# Altium PCB PCB.pcbdoc (part 2 of 2)
Units mil, origin at the board's own origin, x right, y up, seen from the top; angles counter-clockwise.
Board outline 3400 x 4946.88 mil, 4 copper layers (Top Layer, Inner1, Inner2, Bottom Layer); 148 components, 84 nets, 392 pads, 234 vias.
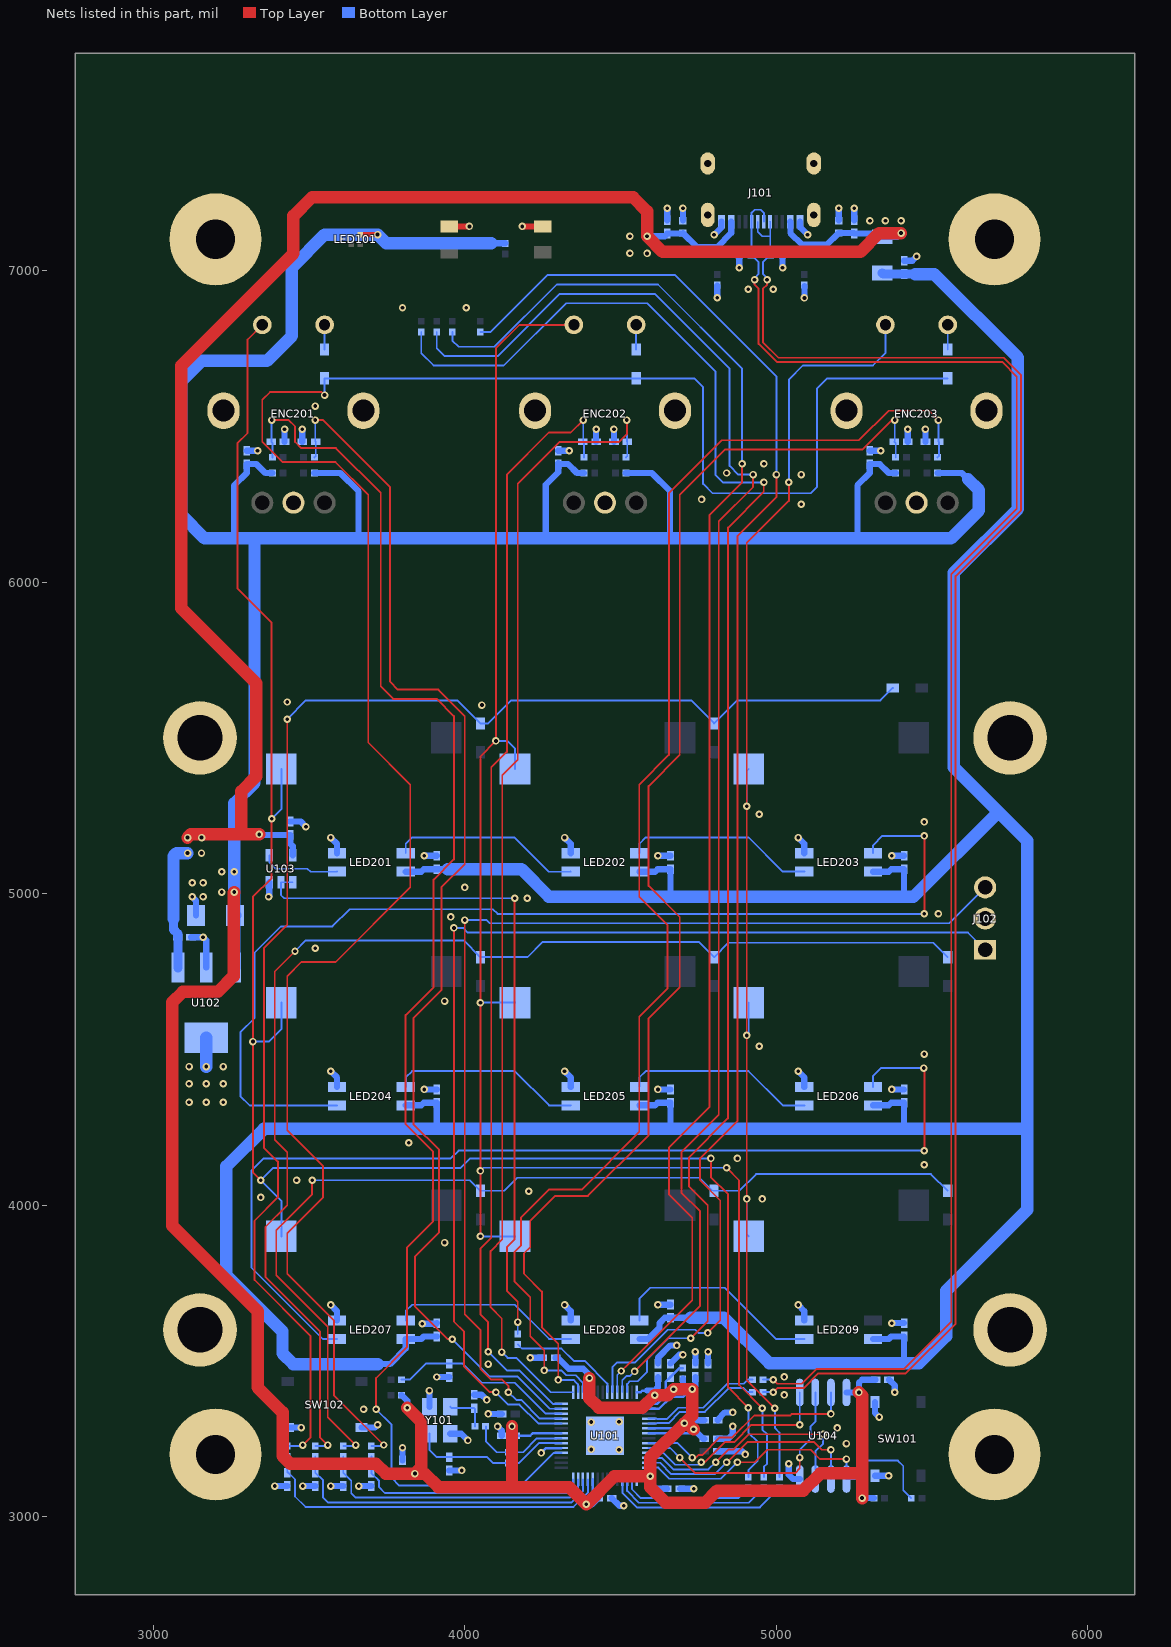
[diagram p4: the nets of this part, all layers, seen from the top]

## Via types
v1: diameter 24.02, hole 12.01, Top Layer to Bottom Layer, 234 vias

## Nets (pads, with @x,y where several pads share a name; then routed paths per layer and width w, separated by ;. In a path a pad name is that pad's centre, name@x,y a point inside that pad or via, vN(x,y) a via of type N, cw(c..) or ccw(c..) an arc to the next point about the centre after c; other vN are vias at no path point) (continued)
+3V3: C102.2 C103.2 C104.2 C105.2 C107.2 C112.2 C113.2 C114.2 C115.2 C116.2 C126.2 C201.2 C202.2 C207.2 LED101.1 R102.1 R103.2 R122.2 R123.2 R201.2 R202.2 R203.2 R204.2 R209.2 R210.2 U101.1 U101.10 U101.22 U101.33 U101.42 U101.44 U101.48 U101.49 U102.3 U104.8 | length 15192.3
  Top Layer w16: LED101.1@3665.16,7115.16 v1(3720,7115.16)
  Top Layer w40: v1(3260,5005) 3257.7,5002.7 3257.7,4735 3207.7,4685 3095,4685 3060.87,4650.87 3060.87,3934.13 3335,3660 3335,3415 3415,3335 3415,3195 3440,3170 3715,3170 3746.46,3138.54 v1(3840,3138.54) ; v1(3815,3350) 3860,3305 3860,3158.54 v1(3840,3138.54) ; v1(4151.46,3290) 4151.46,3107.24 4163.7,3095 ; v1(4400,3445) 4400,3380 4430,3350 4570,3350 v1(4610,3390) 4651.02,3390 v1(4670,3408.98) 4728.98,3408.98 v1(4730,3410) 4730,3325 v1(4705,3300) ; v1(4734.27,3280.73) 4715,3300 v1(4705,3300) ; v1(5265,3398.98) 5275,3388.98 5275,3138.92 ; v1(5275,3060) 5275,3138.92 ; v1(3840,3138.54) 3871.46,3138.54 3915,3095 4163.7,3095 ; 4163.7,3095 4335,3095 v1(4390,3040) 4480,3130 v1(4595,3130) ; v1(4595,3130) 4595,3190 v1(4705,3300) ; v1(4595,3130) 4595,3095 4645,3045 4771.19,3045 4809.86,3083.66 5085.91,3083.66 5141.17,3138.92 5275,3138.92
  Bottom Layer w8.1: C114.2@4161.46,3260 4210,3260 4217.87,3267.87 U101.22@4310.23,3267.87 ; v1(4400,3445) 4410.64,3434.36 U101.33@4410.64,3399.77 ; U101.10@4410.64,3120.23 4410.64,3077.91 C115.2@4428.54,3060 ; U101.1@4552.36,3120.23 4565.23,3120.23 4575,3130 v1(4595,3130) ; U101.42@4552.36,3399.77 4564.77,3399.77 4570,3405 4585,3405 ; U101.49@4589.77,3267.87 4721.41,3267.87 v1(4734.27,3280.73) ; U101.48@4589.77,3283.62 4688.62,3283.62 v1(4705,3300) ; U101.44@4589.77,3346.61 4622.96,3346.61 4661.35,3385 4700,3385 4725,3410 v1(4730,3410)
  Bottom Layer w20: 3260,6140.03 3260,6310 3300,6350 C201.2@3300,6378.54 3331.46,6378.54 3360,6350 R201.2@3382.96,6350 ; R202.2@3517.04,6350 3600,6350 3659,6291 3659,6140 ; R123.2@3797.04,3390 3815,3372.04 v1(3815,3350) ; C102.2@3800,3138.54 v1(3840,3138.54) ; 4085,7087.04 R103.2@4130,7087.04 ; v1(4151.46,3290) 4161.46,3280 C114.2@4161.46,3260 ; 4260,6142.59 4260,6312.56 4300,6352.56 C202.2@4300,6381.1 ; C113.2@4291.46,3510 4298.89,3510 4333.7,3475.19 4379.81,3475.19 4400,3455 v1(4400,3445) ; C202.2@4300,6378.54 4331.46,6378.54 4360,6350 R203.2@4382.96,6350 ; v1(4390,3040) 4408.54,3040 C115.2@4428.54,3060 ; R204.2@4516.74,6350 4599.7,6350 4658.71,6291 4658.71,6140 ; 4585,3405 4610,3405 ; v1(4595,3130) 4595,3110 4615,3090 C116.2@4648.54,3090 ; v1(4610,3390) 4610,3405 ; C105.2@4620,3448.54 4620,3415 4610,3405 ; v1(4670,3408.98) 4683.98,3408.98 4700,3425 R102.1@4700,3442.96 ; v1(4705,3300) 4715,3310 C103.2@4768.54,3310 ; v1(4730,3410) 4740,3420 C107.2@4740,3448.54 ; v1(4734.27,3280.73) 4765,3250 C104.2@4768.54,3250 ; U104.8@5225,3398.98 v1(5265,3398.98) 5265,3430 5275,3440 C126.2@5318.54,3440 ; 5260,6140.03 5260,6310 5300,6350 C207.2@5300,6378.54 5331.46,6378.54 5360,6350 R209.2@5382.96,6350 ; v1(5275,3060) R122.2@5312.96,3060 ; R210.2@5517.04,6350 5595,6350 5615,6330
  Bottom Layer w40: U102.3@3260.55,4762.5 C112.2@3260.55,4927.85 ; C112.2@3262.7,4930 3260,4932.7 v1(3260,5005) v1(3260,5070) 3260,5290 3325,5355 3325,6140 ; 4085,7087.04 3748.12,7087.04 v1(3720,7115.16) 3550.16,7115.16 3445,7010 3445,6790 3365,6710 3155,6710 3090,6645 3090,6215 3165,6140 3260,6140 3325,6140 ; 5615,6330 5650,6295 5650,6230 5560,6140 5259.97,6140 4658.71,6140 3659,6140 3325,6140
  other v1: 3220,5005 3220,5070
+3V3_A: C106.2 R102.2 U101.43 | length 183.2
  Bottom Layer w8.1: U101.43@4589.77,3362.36 4617.36,3362.36 4645,3390 4645,3433.54 C106.2@4660,3448.54 4688.5,3477.04 R102.2@4700,3477.04
+5V_LEDS: C101.2 C210.2 C211.2 C212.2 C213.2 C214.2 C215.2 C216.2 C217.2 C218.2 LED201.1 LED202.1 LED203.1 LED204.1 LED205.1 LED206.1 LED207.1 LED208.1 LED209.1 R101.2 | length 12142.2
  Bottom Layer w20: 3720,3490 3760,3490 3810.24,3540.24 LED207.1@3810.24,3570.47 3860.47,3570.47 3868.54,3578.54 C216.2@3910,3578.54 ; LED204.1@3810.24,4320.47 3860.47,4320.47 3868.54,4328.54 C213.2@3910,4328.54 3910,4247.17 ; LED201.1@3810.24,5070.47 3860.47,5070.47 3868.54,5078.54 C210.2@3910,5078.54 3945,5078.54 ; LED208.1@4560.24,3570.47 4588.53,3570.47 4624.91,3606.85 4624.91,3621.69 4641.76,3638.54 C217.2@4660,3638.54 4725,3638.54 ; LED205.1@4560.24,4320.47 4610.47,4320.47 4618.54,4328.54 C214.2@4660,4328.54 4660,4247.73 4657.27,4245 ; LED202.1@4560.24,5070.47 4610.47,5070.47 4618.54,5078.54 C211.2@4660,5078.54 4660,4991.89 4658.11,4990 ; LED209.1@5310.24,3570.47 5360.47,3570.47 5368.54,3578.54 C218.2@5410,3578.54 5410,3492.7 ; LED206.1@5310.24,4320.47 5360.47,4320.47 5368.54,4328.54 C215.2@5410,4328.54 5410,4247.02 5407.98,4245 ; LED203.1@5310.24,5070.47 5360.47,5070.47 5368.54,5078.54 C212.2@5410,5078.54 5410,4990.1 5410.1,4990
  Bottom Layer w30: R101.2@5340,6991.78 5343.24,6988.54 C101.2@5410,6988.54 5445,6988.54
  Bottom Layer w40: 3720,3490 3449.36,3490 3414.9,3524.47 3414.9,3595.1 3235,3775 3235,4125 3355,4245 4657.27,4245 5407.98,4245 5805,4245 ; 3945,5078.54 4181.46,5078.54 4270,4990 4658.11,4990 5410.1,4990 5440,4990 5712.5,5262.5 ; 4725,3638.54 4831.46,3638.54 4977.3,3492.7 5410,3492.7 5457.7,3492.7 5545,3580 5545,3725 5805,3985 5805,4245 ; 5445,6988.54 5506.46,6988.54 5775,6720 5775,6235 5570,6030 5570,5405 5712.5,5262.5 ; 5712.5,5262.5 5805,5170 5805,4245
+5V_USB: C111.2 C119.2 C120.2 C125.2 D101.2 D102.2 J101.2 J101.11 R101.1 U102.1 U103.5 | length 5969.1
  Top Layer w40: v1(3110,5180) 3120,5190 3282.46,5190 ; v1(3340,5190) 3282.46,5190 ; v1(5400,7120) 5330,7120 5270,7060 4635,7060 v1(4585,7110) 4585,7190 4540,7235 3510,7235 3450,7175 3450,7055 3090,6695 3090,5915.52 3330,5675.52 3330,5375.95 3282.46,5328.41 3282.46,5190
  Bottom Layer w20: v1(3340,5190) 3341.46,5188.54 C125.2@3440,5188.54 3440,5160 3447.41,5152.6 U103.5@3447.41,5123.31 ; v1(4585,7110) 4641.46,7110 C119.2@4650,7118.54 4698.23,7118.54 D101.2@4700,7120.31 4745.31,7075 4810,7075 4855.52,7120.52 J101.2@4855.52,7156.49 ; J101.11@5044.49,7156.49 5045,7155.99 5045,7120 5082.5,7082.5 5162.19,7082.5 D102.2@5200,7120.31 5248.23,7120.31 C120.2@5250,7118.54 5329.68,7118.54 R101.1@5340,7108.22 5388.22,7108.22 v1(5400,7120)
  Bottom Layer w30: 3065,4920 3065,4885 3078.54,4871.46 C111.2@3078.54,4860 3079.45,4859.09 U102.1@3079.45,4762.5
  Bottom Layer w40: 3065,4920 3065,5120 3075,5130 v1(3110,5130)
  other v1: 3154.87,5130 3155,5180 4530,7055 4585,7054.81 4530,7110 5300.09,7160 5350,7160 5400,7160
COL0: ENC201.1 J201.1 J204.1 J207.1 R108.2 | length 6004.2
  Top Layer w6: v1(3345,4080) 3320,4105 v1(3320,4525) 3320,4990 3380,5050 v1(3380,5240) 3380,5870 3270,5980 3270,6445 3302.5,6477.5 3302.5,6778.14 ENC201.1@3350,6825.64 ; v1(4790,4150) 4790,4090 4845,4035 4845,3415 v1(4910,3350)
  Bottom Layer w6: v1(3320,4525) 3371.24,4525 3411.24,4565 J204.1@3411.24,4650 ; v1(3380,5240) 3411.24,5271.24 J201.1@3411.24,5400 ; J207.1@3411.24,3900 3411.24,4013.76 v1(3345,4080) 3384.44,4119.44 3986.84,4119.44 4017.41,4150 v1(4790,4150) ; R108.2@4910,3127.04 4910,3150 4940,3180 4940,3240 4910,3270 v1(4910,3350)
COL0_R: R108.1 U101.2 | length 430.6
  Bottom Layer w6: U101.2@4536.61,3120.23 4536.61,3088.39 4565,3060 4877.04,3060 R108.1@4910,3092.96
COL1: ENC202.1 J202.1 J205.1 J208.1 R110.2 | length 5356.2
  Top Layer w6: v1(4050,3900) v1(4050,4110) v1(4050,4650) 4050,5440 v1(4100,5490) 4100,6750 4175,6825 4349.36,6825 ENC202.1@4350,6825.64 ; v1(4840,4120) 4880,4080 4880,3423.01 v1(4955,3348.01)
  Bottom Layer w6: v1(4050,3900) J208.1@4161.24,3900 ; v1(4050,4110) 4060,4120 v1(4840,4120) ; v1(4050,4650) J205.1@4161.24,4650 ; v1(4100,5490) 4136.24,5490 4161.24,5465 J202.1@4161.24,5400 ; v1(4955,3348.01) 4955,3280 4970,3265 4970,3170 4960,3160 R110.2@4960,3127.04
COL1_R: R110.1 U101.3 | length 512
  Bottom Layer w6: U101.3@4520.86,3120.23 4520.86,3082.92 4558.79,3045 4912.04,3045 R110.1@4960,3092.96
COL2: ENC203.1 J203.1 J206.1 J209.1 R112.2 | length 4411
  Top Layer w6: v1(4995,3348.01) 4905,3438.01 v1(4905,4020) v1(4905,4545) v1(4905,5280) 4905,6125.4 5040,6260.4 v1(5040,6320)
  Bottom Layer w6: v1(4905,4020) 4905,3906.24 J209.1@4911.24,3900 ; v1(4905,4545) 4911.24,4551.24 J206.1@4911.24,4650 ; v1(4905,5280) 4905,5393.76 J203.1@4911.24,5400 ; v1(4995,3348.01) 4995,3285 5010,3270 R112.2@5010,3127.04 ; v1(5040,6320) 5040,6650 5085,6695 5310,6695 5350,6735 ENC203.1@5350,6825.64
COL2_R: R112.1 U101.4 | length 593.4
  Bottom Layer w6: U101.4@4505.11,3120.23 4505.86,3119.48 4505.86,3076.71 4552.57,3030 4947.04,3030 R112.1@5010,3092.96
CON_USB_N: D103.2 J101.5 J101.7 R109.1 | length 5202.8
  Top Layer w6.1: v1(4930,6970) 4930,6954.27 4943.2,6941.07 4943.2,6764.37 5001.17,6706.4 5724.37,6706.4 5771.4,6659.37 5771.4,6235 5561.4,6025 5561.4,3625.63 5409.37,3473.6 5128.6,3473.6 5081.8,3426.8 5003.2,3426.8 v1(4990,3440)
  Bottom Layer w6.1: v1(4930,6970) 4930,6975.63 4943.2,6988.83 4943.2,7026.48 D103.2@4919.69,7050 4920.48,7050.79 J101.5@4920.48,7156.49 4920.48,7185.48 4930,7195 4950,7195 4959.85,7185.15 J101.7@4959.85,7156.49 ; R109.1@4957.04,3440 v1(4990,3440)
CON_USB_P: D104.2 J101.6 J101.8 R111.1 | length 5198.6
  Top Layer w6.1: v1(4970,6970) 4970,6954.27 4956.8,6941.07 4956.8,6770 5006.8,6720 5730,6720 5785,6665 5785,6229.37 5575,6019.37 5575,3620 5415,3460 5134.23,3460 5087.43,3413.2 5002.9,3413.2 v1(4989.7,3400)
  Bottom Layer w6.1: J101.6@4940.15,7156.49 4940.15,7124.85 4955.09,7109.91 4980.31,7109.91 ; R111.1@4956.74,3400 v1(4989.7,3400) ; v1(4970,6970) 4970,6975.63 4956.8,6988.83 4956.8,7026.48 D104.2@4980.31,7050 4980.31,7109.91 ; J101.8@4979.52,7156.49 4980.31,7155.7 4980.31,7109.91
ENC1_A: C203.2 R205.1 U101.18 | length 4734.8
  Top Layer w6: v1(3380,6520) 3435,6520 3455,6500 3455,6450 3475,6430 3586.03,6430 3730,6286.03 3730,5665 3770,5625 3910,5625 3965,5570 3965,5110 3900,5045 3900,4700 3810,4610 3810,4260 3897.5,4172.5 3897.5,3947.5 3815,3865 3815,3545 3715,3445 v1(3715,3345)
  Bottom Layer w6: v1(3380,6520) 3380,6451.46 C203.2@3378.54,6450 3382.96,6445.58 R205.1@3382.96,6400 ; v1(3715,3345) 3765,3295 3765,3125 3790,3100 4180,3100 4284.07,3204.07 4309.42,3204.07 U101.18@4310.23,3204.88
ENC1_B: C204.2 R207.1 U101.27 | length 3997.9
  Top Layer w6: v1(3520,6520) 3545,6520 3760,6305 3760,5680 3785,5655 3915,5655 4000,5570 4000,5095 3925,5020 3925,4690 3835,4600 3835,4260 3917.5,4177.5 3917.5,3912.5 3840,3835 3840,3675 3945,3570 v1(3960,3570)
  Bottom Layer w6: R207.1@3517.04,6400 3521.46,6404.42 C204.2@3521.46,6450 3520,6451.46 v1(3520,6520) ; v1(3960,3570) 4080,3450 4169.66,3450 4273.05,3346.61 U101.27@4310.23,3346.61
ENC1_SW: D210.2 ENC201.2 | length 79.5
  Bottom Layer w6: D210.2@3550,6746.16 ENC201.2@3550,6825.64
ENC2_A: C205.2 R206.1 U101.28 | length 3605.2
  Top Layer w6: v1(4075,3530) 4075,3625 4050,3650 4050,3860 4085,3895 4085,5405 4135,5455 4135,6345 4270,6480 4340,6480 v1(4380,6520)
  Bottom Layer w6: v1(4075,3530) 4135,3470 4175,3470 4282.64,3362.36 U101.28@4310.23,3362.36 ; v1(4380,6520) 4380,6451.46 C205.2@4378.54,6450 4382.96,6445.58 R206.1@4382.96,6400
ENC2_B: C206.2 R208.1 U101.29 | length 3703.6
  Top Layer w6: v1(4118.69,3528.69) 4118.69,3636.31 4082.5,3672.5 4082.5,3852.5 4120,3890 4120,5380 4170,5430 4170,6315 4305,6450 4495,6450 4520,6475 v1(4520,6520)
  Bottom Layer w6: v1(4118.69,3528.69) 4137.39,3510 4165,3510 4275.23,3399.77 U101.29@4347.64,3399.77 ; R208.1@4517.04,6400 4521.46,6404.42 C206.2@4521.46,6450 4520,6451.46 v1(4520,6520)
ENC2_SW: D211.2 ENC202.2 | length 79.5
  Bottom Layer w6: D211.2@4550,6746.16 ENC202.2@4550,6825.64
ENC3_A: C208.2 R211.1 U101.30 | length 4244.3
  Top Layer w6: v1(4300,3439.19) 4300,3555 4247.5,3607.5 4247.5,3722.5 4190,3780 4190,3845 4210,3865 4210,3950 4290,4030 4395,4030 4590,4225 4590,4600 4690,4700 4690,4925 4590,5025 4590,5345 4690,5445 4690,6280 4835,6425 5275,6425 5370,6520 v1(5380,6520)
  Bottom Layer w6: v1(4300,3439.19) 4349.19,3439.19 4355.96,3432.42 4356.13,3432.42 4362.57,3425.98 4362.57,3425.81 4363.39,3425 U101.30@4363.39,3399.77 ; v1(5380,6520) 5380,6451.46 C208.2@5378.54,6450 5382.96,6445.58 R211.1@5382.96,6400
ENC3_B: C209.2 R212.1 U101.31 | length 4476.6
  Top Layer w6: v1(4255,3469.6) 4255,3535 4210,3580 4210,3705 4160,3755 4160,3850 4180,3870 4180,3960 4270,4050 4375,4050 4560,4235 4560,4605 4650,4695 4650,4900 4560,4990 4560,5350 4655,5445 4655,6285 4825,6455 5265,6455 5360,6550 5490,6550 v1(5520,6520)
  Bottom Layer w6: v1(4255,3469.6) 4309.6,3469.6 4325,3454.19 4355.57,3454.19 4379.14,3430.63 U101.31@4379.14,3399.77 ; R212.1@5517.04,6400 5521.46,6404.42 C209.2@5521.46,6450 5520,6451.46 v1(5520,6520)
ENC3_SW: D212.2 ENC203.2 | length 79.5
  Bottom Layer w6: D212.2@5550,6746.16 ENC203.2@5550,6825.64
GND: C101.1 C102.1 C103.1 C104.1 C105.1 C106.1 C107.1 C108.1 C109.1 C110.1 C111.1 C112.1 C113.1 C114.1 C115.1 C116.1 C117.1 C118.1 C119.1 C120.1 C121.1 C122.1 C123.2 C124.2 C125.1 C126.1 C127.1 C201.1 C202.1 C203.1 C204.1 C205.1 C206.1 C207.1 C208.1 C209.1 C210.1 C211.1 C212.1 C213.1 C214.1 C215.1 C216.1 C217.1 C218.1 D101.1 D102.1 D103.1 D104.1 ENC201.3 ENC201.4 ENC201.C ENC202.3 ENC202.4 ENC202.C ENC203.3 ENC203.4 ENC203.C J101.1 J101.12 J101.13 J101.14 J102.2 LED102.2 LED103.2 LED201.3 LED202.3 LED203.3 LED204.3 LED205.3 LED206.3 LED207.3 LED208.3 LED209.3 MH201.1 MH202.1 MH203.1 MH204.1 MH205.1 MH206.1 MH207.1 MH208.1 R118.1 R119.1 SW101.1 SW101.2 SW102.1 SW102.2 U101.19 U101.57 U102.2 U102.4 U103.3 U104.4 Y101.2 Y101.4 | length 3731.7
  Top Layer w20: LED103.2@3950,7141.35 v1(4015,7141.35) ; v1(4184.45,7141.35) LED102.2@4249.45,7141.35
  Bottom Layer w8.1: v1(4245,3205) 4260.63,3220.63 U101.19@4310.23,3220.63
  Bottom Layer w20: C111.1@3121.46,4860 v1(3160,4860) 3170,4850 U102.2@3170,4762.5 ; v1(3125,4990) 3137.3,4977.7 C112.1@3137.3,4930 ; C201.1@3300,6421.46 v1(3335,6421.46) ; v1(3370,4990) 3372.61,4992.6 U103.3@3372.61,5036.69 ; v1(3390,3098.54) C117.1@3430,3098.54 ; C203.1@3421.46,6450 v1(3421.46,6490) ; SW102.1@3431.89,3286.18 v1(3475,3286.18) ; C125.1@3440,5231.46 3473.54,5231.46 v1(3490,5215) ; C204.1@3478.54,6450 v1(3478.54,6490) ; v1(3480,3098.54) C118.1@3520,3098.54 ; v1(3570,3098.54) C121.1@3610,3098.54 ; v1(3570,3680) 3589.76,3660.24 LED207.3@3589.76,3629.53 ; v1(3570,4430) 3589.76,4410.24 LED204.3@3589.76,4379.53 ; v1(3570,5180) 3589.76,5160.24 LED201.3@3589.76,5129.53 ; v1(3660,3098.54) C122.1@3700,3098.54 ; SW102.2@3668.11,3286.18 3711.18,3286.18 v1(3720,3295) ; C102.1@3800,3181.46 v1(3800,3221.46) ; v1(3863,3619.46) 3908,3619.46 C216.1@3910,3621.46 ; v1(3870,4371.46) C213.1@3910,4371.46 ; v1(3870,5121.46) C210.1@3910,5121.46 ; Y101.2@3886.53,3353.31 v1(3886.53,3405) ; v1(3910,3448.54) C127.1@3950,3448.54 ; C123.2@3950,3148.54 v1(3990,3148.54) ; Y101.4@3953.47,3266.69 3988.31,3266.69 v1(4010,3245) ; C124.2@4030,3391.46 4053.54,3391.46 v1(4070,3375) ; v1(4075,3330) C110.1@4118.54,3330 ; v1(4105,3290) 4118.54,3276.46 C114.1@4118.54,3260 ; v1(4210,3510) C113.1@4248.54,3510 ; C202.1@4300,6421.46 v1(4335,6421.46) ; v1(4320,3680) 4339.76,3660.24 LED208.3@4339.76,3629.53 ; v1(4320,4430) 4339.76,4410.24 LED205.3@4339.76,4379.53 ; v1(4320,5180) 4339.76,5160.24 LED202.3@4339.76,5129.53 ; C205.1@4421.46,6450 v1(4421.46,6490) ; C115.1@4471.46,3060 4496.46,3035 v1(4510,3035) ; C206.1@4478.54,6450 v1(4478.54,6490) ; C105.1@4620,3491.46 4620,3510 4660,3550 v1(4680,3550) ; v1(4620,3680.67) C217.1@4660,3680.67 ; v1(4620,4371.46) C214.1@4660,4371.46 ; v1(4620,5121.46) C211.1@4660,5121.46 ; C119.1@4650,7161.46 v1(4650,7200) ; C106.1@4660,3491.46 4688.54,3520 v1(4700,3520) ; C116.1@4691.46,3090 v1(4735,3090) ; D101.1@4700.01,7161.46 v1(4700.01,7200) ; C107.1@4740,3491.46 v1(4740,3530) ; C108.1@4780.61,3491.46 v1(4780.61,3530) ; v1(4800,7115) 4824.02,7139.02 J101.1@4824.02,7156.49 ; v1(4810,6912.15) R119.1@4810,6950.69 ; C109.1@4811.46,3210 4890,3210 v1(4900,3200) ; C104.1@4811.46,3250 4845,3250 4860,3265 v1(4860,3290) ; C103.1@4811.46,3310 4811.46,3311.46 4835,3335 v1(4860,3335) ; v1(4881.1,7008.91) D103.1@4881.1,7047.45 ; v1(5019.68,7008.9) D104.1@5019.68,7047.44 ; v1(5040,3170) 5040,3135 5053.98,3121.02 U104.4@5075,3121.02 ; v1(5070,3680) 5089.76,3660.24 LED209.3@5089.76,3629.53 ; v1(5070,4430) 5089.76,4410.24 LED206.3@5089.76,4379.53 ; v1(5070,5180) 5089.76,5160.24 LED203.3@5089.76,5129.53 ; J101.12@5075.98,7156.49 5075.98,7139.02 v1(5100,7115) ; v1(5090,6911.86) R118.1@5090,6950.4 ; D102.1@5200.01,7161.46 v1(5200.01,7200) ; C120.1@5250,7161.46 v1(5250,7200) ; C207.1@5300,6421.46 v1(5335,6421.46) ; SW101.2@5316.18,3131.89 v1(5360,3131.89) ; SW101.1@5316.18,3368.11 5316.18,3333.82 v1(5330,3320) ; C126.1@5361.46,3440 5380,3421.46 v1(5380,3400) ; v1(5370,3621.46) C218.1@5410,3621.46 ; v1(5370,4371.46) C215.1@5410,4371.46 ; v1(5370,5121.46) C212.1@5410,5121.46 ; C101.1@5410,7031.46 5436.46,7031.46 v1(5450,7045) ; C208.1@5421.46,6450 v1(5421.46,6490) ; C209.1@5478.54,6450 v1(5478.54,6490)
  Bottom Layer w40: v1(3170,4445) U102.4@3170,4537.5
  other v1: 4495,3215 4406.18,3216.18 5225,3235 5195,3285 4406.18,3303.82 4495,3305 3675,3345 5025,3391.14 5025,3448.86 4075,3490 3935,3880 4955,4020 3345,4025 4205,4045 3460,4080 5475,4130 4875,4150 3820,4200 3115,4330 3170,4330 3225,4330 3115,4390 3170,4390 3225,4390 3115,4445 3225,4445 5475,4485 4945,4510 3935,4655 3520,4825 3955,4925 5520,4935 4200,4985 3160,4990 4000,5020 3125,5035 3160,5035 5475,5230 4945,5255 4055,5605 3430,5615 5080,6250 4760,6265 5080,6345 4840,6350 4960,6380 3520,6565 3800,6880 4005,6880 4910,6940 4990,6940
LED0_BUF: R117.2 U103.1 U103.2 | length 2256
  Top Layer w6: v1(4160,4985) 4160,3890 4135,3865 4135,3725 4170,3690 v1(4170,3625)
  Bottom Layer w6: U103.1@3447.39,5036.69 U103.2@3410.01,5036.69 3410,4995 3420,4985 v1(4160,4985) ; R117.2@4170,3587.04 v1(4170,3625)
LED0_DIN: LED201.4 U103.4 | length 253.1
  Bottom Layer w6: U103.4@3372.59,5123.31 3372.59,5100 3392.59,5080 3495,5080 3505,5070 3589.29,5070 LED201.4@3589.76,5070.47
LED0_RES: R117.1 U101.36 | length 367.4
  Bottom Layer w6: R117.1@4170,3552.96 4182.96,3540 4310,3540 4350,3500 4385,3500 4457.88,3427.12 U101.36@4457.88,3399.77
LED1_DIN: LED201.2 LED202.4 | length 614
  Bottom Layer w6: LED201.2@3810.24,5129.53 3810.24,5160 3830.24,5180 4160,5180 4270,5070 4339.29,5070 LED202.4@4339.76,5070.47
LED2_DIN: LED202.2 LED203.4 | length 614
  Bottom Layer w6: LED202.2@4560.71,5130 4560.71,5160.47 4580.71,5180.47 4910.47,5180.47 5020.47,5070.47 LED203.4@5089.76,5070.47 LED203.4@5090.23,5070.94
LED3_DIN: LED203.2 LED204.4 | length 3467.9
  Top Layer w6: v1(5475,4935) v1(5475,5185)
  Bottom Layer w6: LED204.4@3589.76,4320.47 3589.29,4320 3310,4320 3280,4350 3280,4555 3325,4600 3325,4810 3410,4895 3575,4895 3630,4950 4090,4950 4105,4935 v1(5475,4935) ; LED203.2@5310.24,5129.53 5310.24,5155 5340.24,5185 v1(5475,5185)
LED4_DIN: LED204.2 LED205.4 | length 614
  Bottom Layer w6: LED204.2@3810.71,4380 3810.71,4410.47 3830.71,4430.47 4160.47,4430.47 4270.47,4320.47 LED205.4@4339.76,4320.47 LED205.4@4340.23,4320.94
LED5_DIN: LED205.2 LED206.4 | length 614
  Bottom Layer w6: LED205.2@4560.71,4380 4560.71,4410.47 4580.71,4430.47 4910.47,4430.47 5020.47,4320.47 LED206.4@5089.76,4320.47 LED206.4@5090.23,4320.94
LED6_DIN: LED206.2 LED207.4 | length 3341.4
  Top Layer w6: v1(5473.15,4440) 5475,4438.15 v1(5475,4175)
  Bottom Layer w6: LED207.4@3589.76,3570.47 3544.53,3570.47 3315,3800 3315,4110 3355,4150 3955,4150 3980,4175 v1(5475,4175) ; LED206.2@5310.24,4379.53 5310.24,4415.24 5335,4440 v1(5473.15,4440)
LED7_DIN: LED207.2 LED208.4 | length 614
  Bottom Layer w6: LED207.2@3810.71,3630 3810.71,3660.47 3830.71,3680.47 4160.47,3680.47 4270.47,3570.47 LED208.4@4339.76,3570.47 LED208.4@4340.23,3570.94
LED8_DIN: LED208.2 LED209.4 | length 683
  Bottom Layer w6: LED208.2@4560.24,3629.53 4560.24,3700 4595.24,3735 4835,3735 5000,3570 5089.29,3570 LED209.4@5089.76,3570.47
QSPI_SCLK: U101.52 U104.6 | length 789.5
  Top Layer w6: v1(4690,3190) 4740,3140 5060,3140 5075,3155 v1(5075,3190)
  Bottom Layer w6: U101.52@4589.77,3220.63 4659.37,3220.63 v1(4690,3190) ; v1(5075,3190) 5075,3215 5110,3250 5110,3290 5125,3305 U104.6@5125,3398.98
QSPI_SD0: U101.53 U104.5 | length 657.9
  Top Layer w6: v1(4758.8,3175) 4770.21,3175 4835,3239.79 4864.83,3239.79 4920.04,3295 v1(5075,3295)
  Bottom Layer w6: U101.53@4589.77,3204.88 4590.52,3204.13 4638.33,3204.13 4675.47,3166.99 4750.8,3166.99 v1(4758.8,3175) ; v1(5075,3295) U104.5@5075,3398.98
QSPI_SD1: U101.55 U104.2 | length 747.3
  Top Layer w6: v1(4840,3175) 4842.46,3175 4907.46,3240 5120,3240 5145,3215 v1(5175,3215)
  Bottom Layer w6: U101.55@4589.77,3173.38 4626.66,3173.38 4663.04,3136.99 4801.99,3136.99 v1(4840,3175) ; U104.2@5175,3121.02 v1(5175,3215)
QSPI_SD2: U101.54 U104.3 | length 776.8
  Top Layer w6: v1(4805,3175) 4845.31,3215.31 4861.56,3215.31 4911.25,3265 v1(5150,3265)
  Bottom Layer w6: U101.54@4589.77,3189.13 4632.12,3189.13 4669.26,3151.99 4781.99,3151.99 v1(4805,3175) ; U104.3@5125,3121.02 5125,3210 5150,3235 v1(5150,3265)
QSPI_SD3: U101.51 U104.7 | length 731.4
  Top Layer w6: v1(4730,3190) 4741.26,3190 4749.27,3198.01 4761.85,3198.01 4818.63,3254.79 4858.61,3254.79 4928.82,3325 5045,3325 5050,3330 v1(5175,3330)
  Bottom Layer w6: U101.51@4589.77,3236.38 4683.62,3236.38 v1(4730,3190) ; v1(5175,3330) U104.7@5175,3398.98
QSPI_SS: R124.2 U101.56 U104.1 | length 1109.7
  Top Layer w6: v1(4875,3175) 4930,3175 4970,3215 5110,3215 5140,3185 v1(5225,3185)
  Bottom Layer w6: U101.56@4589.77,3157.64 4621.18,3157.64 4656.83,3121.99 4821.99,3121.99 v1(4875,3175) ; v1(5225,3185) U104.1@5225,3121.02 5251.02,3121.02 5270,3140 5270,3170 5280,3180 5390,3180 5407.14,3162.86 5407.14,3085.82 R124.2@5432.96,3060
RESET_N: C127.2 R125.2 U101.26 | length 601
  Bottom Layer w6: R125.2@3797.04,3440 3823.54,3440 3875,3491.46 C127.2@3950,3491.46 3993.54,3491.46 4055,3430 4160,3430 4259.14,3330.86 U101.26@4310.23,3330.86
ROW0: D201.1 D202.1 D203.1 R113.2 | length 4654.5
  Top Layer w6: v1(3430,5560) 3430,4900 3355,4825 3355,4185 3400,4140 3400,4025 3325,3950 3325,3760 3505,3580 3505,3255 v1(3480,3230)
  Bottom Layer w6: R113.2@3430,3227.04 3477.04,3227.04 v1(3480,3230) ; v1(3430,5560) 3490,5620 3976.16,5620 D201.1@4050,5546.16 4075,5546.16 4148.84,5620 4726.16,5620 D202.1@4800,5546.16 4873.84,5620 5333.84,5620 D203.1@5373.84,5660
ROW0_R: C117.2 R113.1 U101.11 | length 1156.2
  Bottom Layer w6: R113.1@3430,3192.96 C117.2@3430,3141.46 3433.54,3141.46 3455,3120 3455,3065 3488.73,3031.27 4348.73,3031.27 4394.89,3077.42 U101.11@4394.89,3120.23
ROW1: D204.1 D205.1 D206.1 R114.2 | length 3992
  Top Layer w6: v1(3455,4815) 3390,4750 3390,4210 3430,4170 3430,4000 3360,3930 3360,3770 3535,3595 3535,3255 v1(3560,3230)
  Bottom Layer w6: v1(3455,4815) 3490,4850 3996.16,4850 D204.1@4050,4796.16 4201.16,4796.16 4250,4845 4751.16,4845 D205.1@4800,4796.16 4846.07,4842.23 5503.93,4842.23 D206.1@5550,4796.16 ; R114.2@3520,3227.04 3557.04,3227.04 v1(3560,3230)
ROW1_R: C118.2 R114.1 U101.12 | length 1035.5
  Bottom Layer w6: R114.1@3520,3192.96 C118.2@3520,3141.46 3545,3116.46 3545,3061.27 3560,3046.27 4342.52,3046.27 4379.89,3083.64 4379.89,3119.48 U101.12@4379.14,3120.23
ROW2: D207.1 D208.1 D209.1 R115.2 | length 3177.8
  Top Layer w6: v1(3510,4080) 3510,4035 3395,3920 3395,3775 3560,3610 3560,3320 v1(3650,3230)
  Bottom Layer w6: v1(3510,4080) 4016.16,4080 D207.1@4050,4046.16 4126.16,4046.16 4168.08,4088.08 4753.08,4088.08 4795,4046.16 D208.1@4800,4046.16 4881.16,4046.16 4935,4100 5496.16,4100 D209.1@5550,4046.16 ; R115.2@3610,3227.04 3647.04,3227.04 v1(3650,3230)
ROW2_R: C121.2 R115.1 U101.13 | length 904.7
  Bottom Layer w6: R115.1@3610,3192.96 C121.2@3610,3141.46 3635.63,3115.83 3635.63,3075.63 3650,3061.27 4336.3,3061.27 4363.38,3088.34 U101.13@4363.39,3120.23
ROW3: D210.1 D211.1 D212.1 R116.2 | length 7084
  Top Layer w6: v1(3550,6600) 3540,6610 3375,6610 3350,6585 3350,6450 3415,6385 3585,6385 3690,6280 3690,5485 3825,5350 3825,5020 3585.54,4780.54 3475.54,4780.54 3430,4735 3430,4240 3545,4125 3545,4025 3430,3910 3430,3780 3580,3630 3580,3390.3 v1(3740,3230.3)
  Bottom Layer w6: v1(3550,6600) D210.1@3550,6653.84 D211.1@4550,6653.84 4736.16,6653.84 4765,6625 4765,6315 4795,6285 5110,6285 5130,6305 5130,6620 5163.84,6653.84 D212.1@5550,6653.84 ; R116.2@3700,3227.34 3737.04,3227.34 v1(3740,3230.3)
ROW3_R: C122.2 R116.1 U101.14 | length 772.6
  Bottom Layer w6: R116.1@3700,3192.96 C122.2@3700,3141.46 3700,3140 3714.91,3125.09 3715.19,3125.09 3721.63,3118.65 3721.63,3118.37 3725,3115 3725,3095 3743.73,3076.27 4330.09,3076.27 4347.64,3093.81 U101.14@4347.64,3120.23
SWCLK: J102.1 U101.24 | length 3543.5
  Top Layer w6: v1(3965,4890) 3965,3626.73 3997.86,3593.87 3997.86,3482.14 4080,3400 v1(4100,3400)
  Bottom Layer w6: v1(3965,4890) 3995,4890 4010,4875 5615,4875 J102.1@5670,4820 ; v1(4100,3400) 4140,3360 4175,3360 4235.63,3299.37 U101.24@4310.23,3299.37
SWDIO: J102.3 U101.25 | length 3520.7
  Top Layer w6: v1(4000,4915) 4000,3650 4050,3600 4050,3475 4085,3440 4120,3440 4140,3420 v1(4140,3400)
  Bottom Layer w6: v1(4000,4915) 4070,4915 4080,4905 5555,4905 J102.3@5670,5020 ; v1(4140,3400) 4165,3375 4181.21,3375 4241.09,3315.12 U101.25@4310.23,3315.12
USB_N: R109.2 U101.46 | length 385.8
  Bottom Layer w6.1: U101.46@4589.77,3315.12 4615.14,3315.12 4616.21,3314.05 4649.05,3314.05 4685,3350 4765,3350 4841.8,3426.8 4894.9,3426.8 4908.1,3440 R109.2@4922.96,3440
USB_P: R111.2 U101.47 | length 385.8
  Bottom Layer w6.1: U101.47@4589.77,3299.37 4615.14,3299.37 4616.21,3300.45 4654.68,3300.45 4690.63,3336.4 4770.63,3336.4 4847.43,3413.2 4894.9,3413.2 4908.1,3400 R111.2@4922.96,3400
USER_LED1: R104.2 U101.37 | length 4815.5
  Top Layer w6: v1(4780,3590) 4820,3630 4820,4015 4755,4080 4755,4150 4875,4270 4875,6147.2 5000,6272.2 v1(5000,6345)
  Bottom Layer w6: R104.2@4050,6802.96 4082.96,6802.96 4265,6985 4675,6985 5000,6660 v1(5000,6345) ; U101.37@4473.62,3399.77 4473.62,3480 4489.31,3495.69 4546.68,3495.69 4651,3600 4740,3600 4750,3590 v1(4780,3590)
USER_LED2_B: R107.2 U101.40 | length 4908.5
  Top Layer w6: v1(4725,3573.01) 4779.66,3627.67 4779.66,3999.66 4719.66,4059.66 4719.66,4153.35 4844.66,4278.35 4844.66,5844.66 4845,5845 4845,6175 4959.66,6289.66 4959.66,6319.66 v1(4960,6320)
  Bottom Layer w6: R107.2@3860,6802.96 3860,6735 3900,6695 4125,6695 4325,6895 4585,6895 4805,6675 4805,6343.06 4828.06,6320 v1(4960,6320) ; U101.40@4520.86,3399.77 4520.86,3425.86 4530,3435 4555,3435 4585,3465 4585,3504.7 4653.31,3573.01 v1(4725,3573.01)
USER_LED2_G: R106.2 U101.39 | length 4760.1
  Top Layer w6: v1(4545,3466.54) 4755,3676.54 4755,3980 4695,4040 4695,4170 4815,4290 4815,6195 4925,6305 v1(4925,6345)
  Bottom Layer w6: R106.2@3910,6802.96 3910,6750 3935,6725 4105,6725 4305,6925 4610,6925 4850,6685 4850,6372.54 4877.54,6345 v1(4925,6345) ; U101.39@4505.11,3399.77 4505.11,3438.2 4518.46,3451.54 4530,3451.54 v1(4545,3466.54)
USER_LED2_R: R105.2 U101.38 | length 4674.6
  Top Layer w6: v1(4502.19,3467.81) 4524.38,3490 4525,3490 4730,3695 4730,3960 4655,4035 4655,4185 4785,4315 4785,6215 4890,6320 v1(4890,6380)
  Bottom Layer w6: R105.2@3960,6802.96 3960,6775 3980,6755 4095,6755 4295,6955 4620,6955 4890,6685 v1(4890,6380) ; U101.38@4489.38,3399.77 4489.38,3455 v1(4502.19,3467.81)
X_R: C124.1 R121.1 Y101.3 | length 138.3
  Bottom Layer w6: Y101.3@3953.47,3353.31 3958.24,3348.54 C124.1@4030,3348.54 4032.96,3345.58 R121.1@4032.96,3290
XIN: C123.1 R120.2 U101.20 Y101.1 | length 519.1
  Bottom Layer w6: Y101.1@3886.53,3266.69 3886.53,3214.93 3910,3191.46 C123.1@3950,3191.46 4071.5,3191.46 4090,3172.96 R120.2@4140,3172.96 4174.17,3172.96 4237.59,3236.38 U101.20@4310.23,3236.38
XOUT: R120.1 R121.2 U101.21 | length 323.8
  Bottom Layer w6: R121.2@4067.04,3290 4067.5,3289.54 4067.5,3242.5 4102.96,3207.04 R120.1@4140,3207.04 4187.04,3207.04 4231.38,3251.38 4294.49,3251.38 4295.23,3252.12 U101.21@4310.23,3252.12
pads on no net: J101.3 J101.9 LED209.2 U101.5 U101.6 U101.7 U101.8 U101.9 U101.15 U101.16 U101.17 U101.32 U101.34 U101.35 U101.41

## Polygon pours and split planes (outlines as drawn)
+5V_USB on Bottom Layer (solid, remove dead copper, pour order 12): 3045,5200 3170,5200 3170,5110 3045,5110
+5V_USB on Top Layer (solid, remove dead copper, pour order 2): 3045,5310 3360,5310 3360,5110 3045,5110
+3V3 on Top Layer (solid, remove dead copper, pour order 4): 3205,5085 3295,5085 3295,4990 3205,4990
+5V_LEDS on Bottom Layer (solid, remove dead copper, pour order 18): 5500,4580 5805,4580 5805,4245 5500,4245
+5V_USB on Bottom Layer (solid, remove dead copper, pour order 8): 4750,7130 4750,7035 4505,7035 4505,7130
+5V_USB on Bottom Layer (solid, remove dead copper, pour order 10): 5420,7080 5420,7180 5280,7180 5280,7130 5155,7130 5155,7065 5270,7065 5270,7080
+5V_USB on Top Layer (solid, remove dead copper, pour order 0): 4505,7130 5230.37,7130 5280.37,7180 5420,7180 5420,7010 4505,7010
GND on Bottom Layer (solid, remove dead copper, pour order 14): 3175,5050 3175,4880 3195,4860 3195,4662.57 3242.43,4662.57 3245,4660 3245,4315 3040,4315 3040,4662.57 3142.57,4662.57 3145,4665 3145,4825 3135,4835 3105,4835 3105,5050
+3V3 on Bottom Layer (solid, remove dead copper, pour order 16): 3205,5085 3295,5085 3295,4710 3232.7,4710 3230.87,4708.17 3230.87,4963.45 3205,4989.33
+3V3 on Top Layer (solid, remove dead copper, pour order 6): 3790,3370.37 3969.99,3370.37 4094.99,3245.37 4325.37,3245.37 4380,3300 4380,3380 4575,3380 4600,3405 4642.59,3405 4662.59,3425 4740,3425 4740,3288.63 4652.75,3201.38 4652.75,3092.75 4585,3025 3790,3025

## Keep-outs
Board Outline Layer:
  lines w10: 3000,3200 3000,7100 cw(c3200,7100) 3200,7300 4720,7300 4720,7400 5180,7400 5180,7300 5700,7300 cw(c5700,7100) 5900,7100 5900,3200 cw(c5700,3200) 5700,3000 3200,3000 cw(c3200,3200) 3000,3200

## Silkscreen, mask and mechanical layers (free items; w line width, h text height)
Top Silkscreen Layer:
  text "RGB" at 3650,6980 h60
  text "USER" at 3950,6930 h60
  text "POWER" at 4250,6930 h60
  text "USER" at 3650,6920 h60
Bottom Silkscreen Layer:
  text "CUSTOM KEYBOARD DESIGN" at 4490,5920 h123
  text "https://github.com/mjvarga" at 4480,5790 h100
  text "2026" at 4470,5660 h100
  text "MYKEYBOARD V1.0" at 3130,4450 h80 r90
  text "MICHAEL VARGA" at 3220,4400 h80 r90
  text "RESET" at 3400,3460 h80 r90
  text "BOOT" at 5590,3420 h80 r90
Bottom Solder Mask Layer:
  region: 4141 vertices and 0 holes, not listed, extent 5520,4271.81 5780,4550

## Text inside footprints (layer, text, board x,y; h text height)
LED201: Bottom Silkscreen Layer "GND" at 3502.36,5140.55 h19.68 r180
LED202: Bottom Silkscreen Layer "GND" at 4252.36,5140.55 h19.68 r180
LED203: Bottom Silkscreen Layer "GND" at 5002.36,5140.55 h19.68 r180
LED204: Bottom Silkscreen Layer "GND" at 3502.36,4390.55 h19.68 r180
LED205: Bottom Silkscreen Layer "GND" at 4252.36,4390.55 h19.68 r180
LED206: Bottom Silkscreen Layer "GND" at 5002.36,4390.55 h19.68 r180
LED207: Bottom Silkscreen Layer "GND" at 3502.36,3640.55 h19.68 r180
LED208: Bottom Silkscreen Layer "GND" at 4252.36,3640.55 h19.68 r180
LED209: Bottom Silkscreen Layer "GND" at 5002.36,3640.55 h19.68 r180